# Allegro board XME0726CB_R10_Board_source_file.BRD
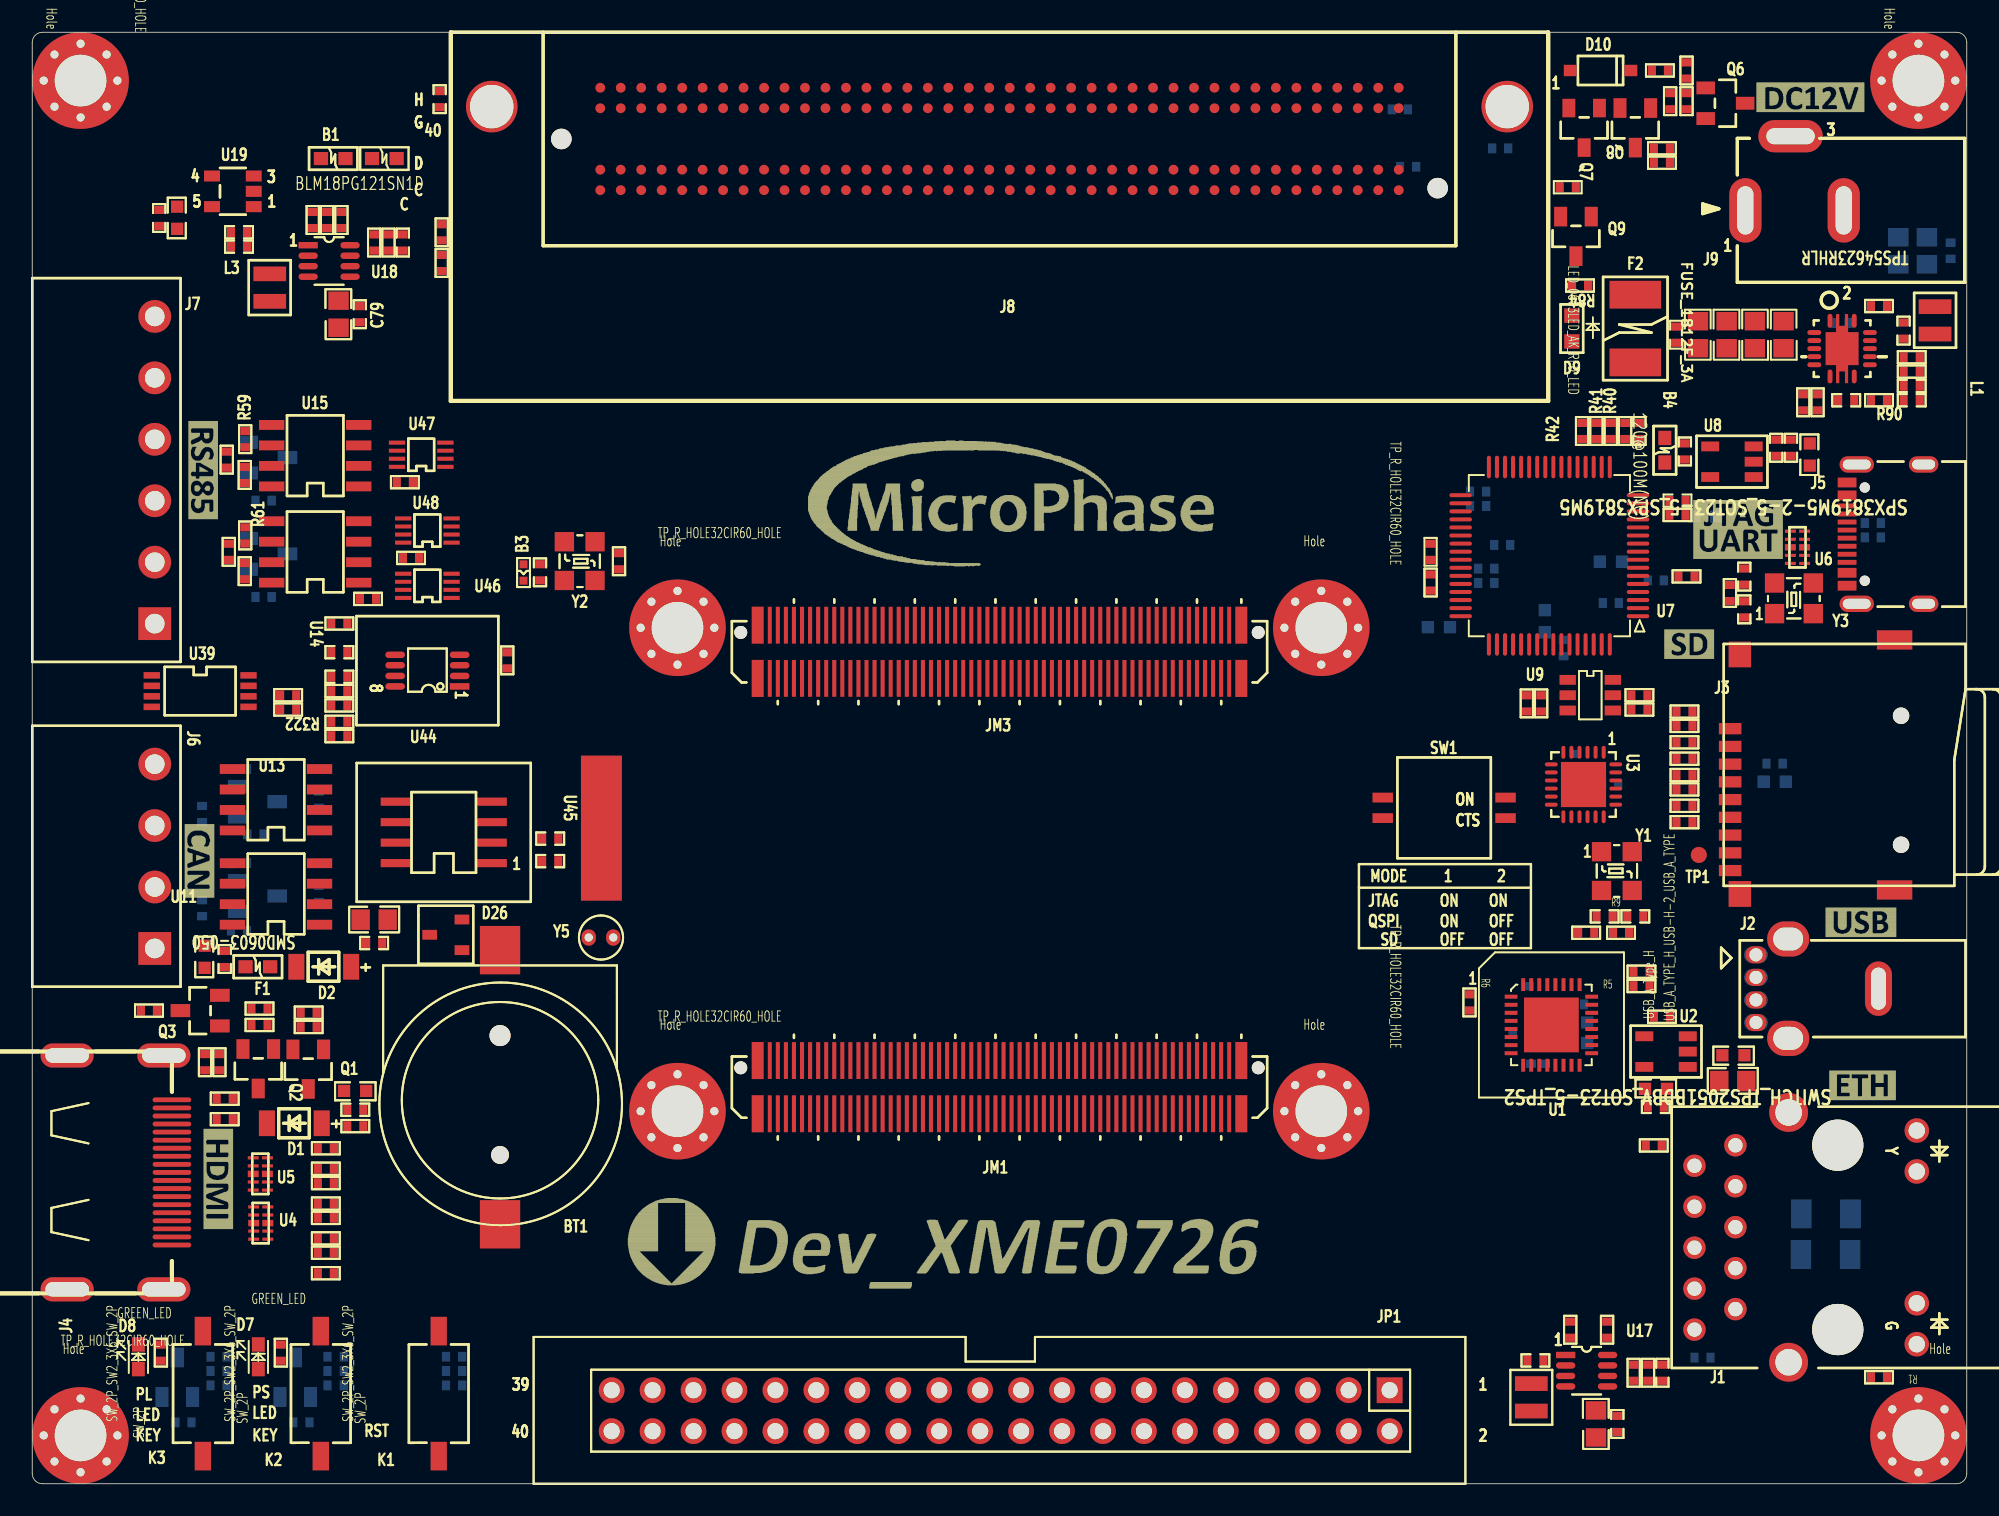
[diagram p0: board, top side]
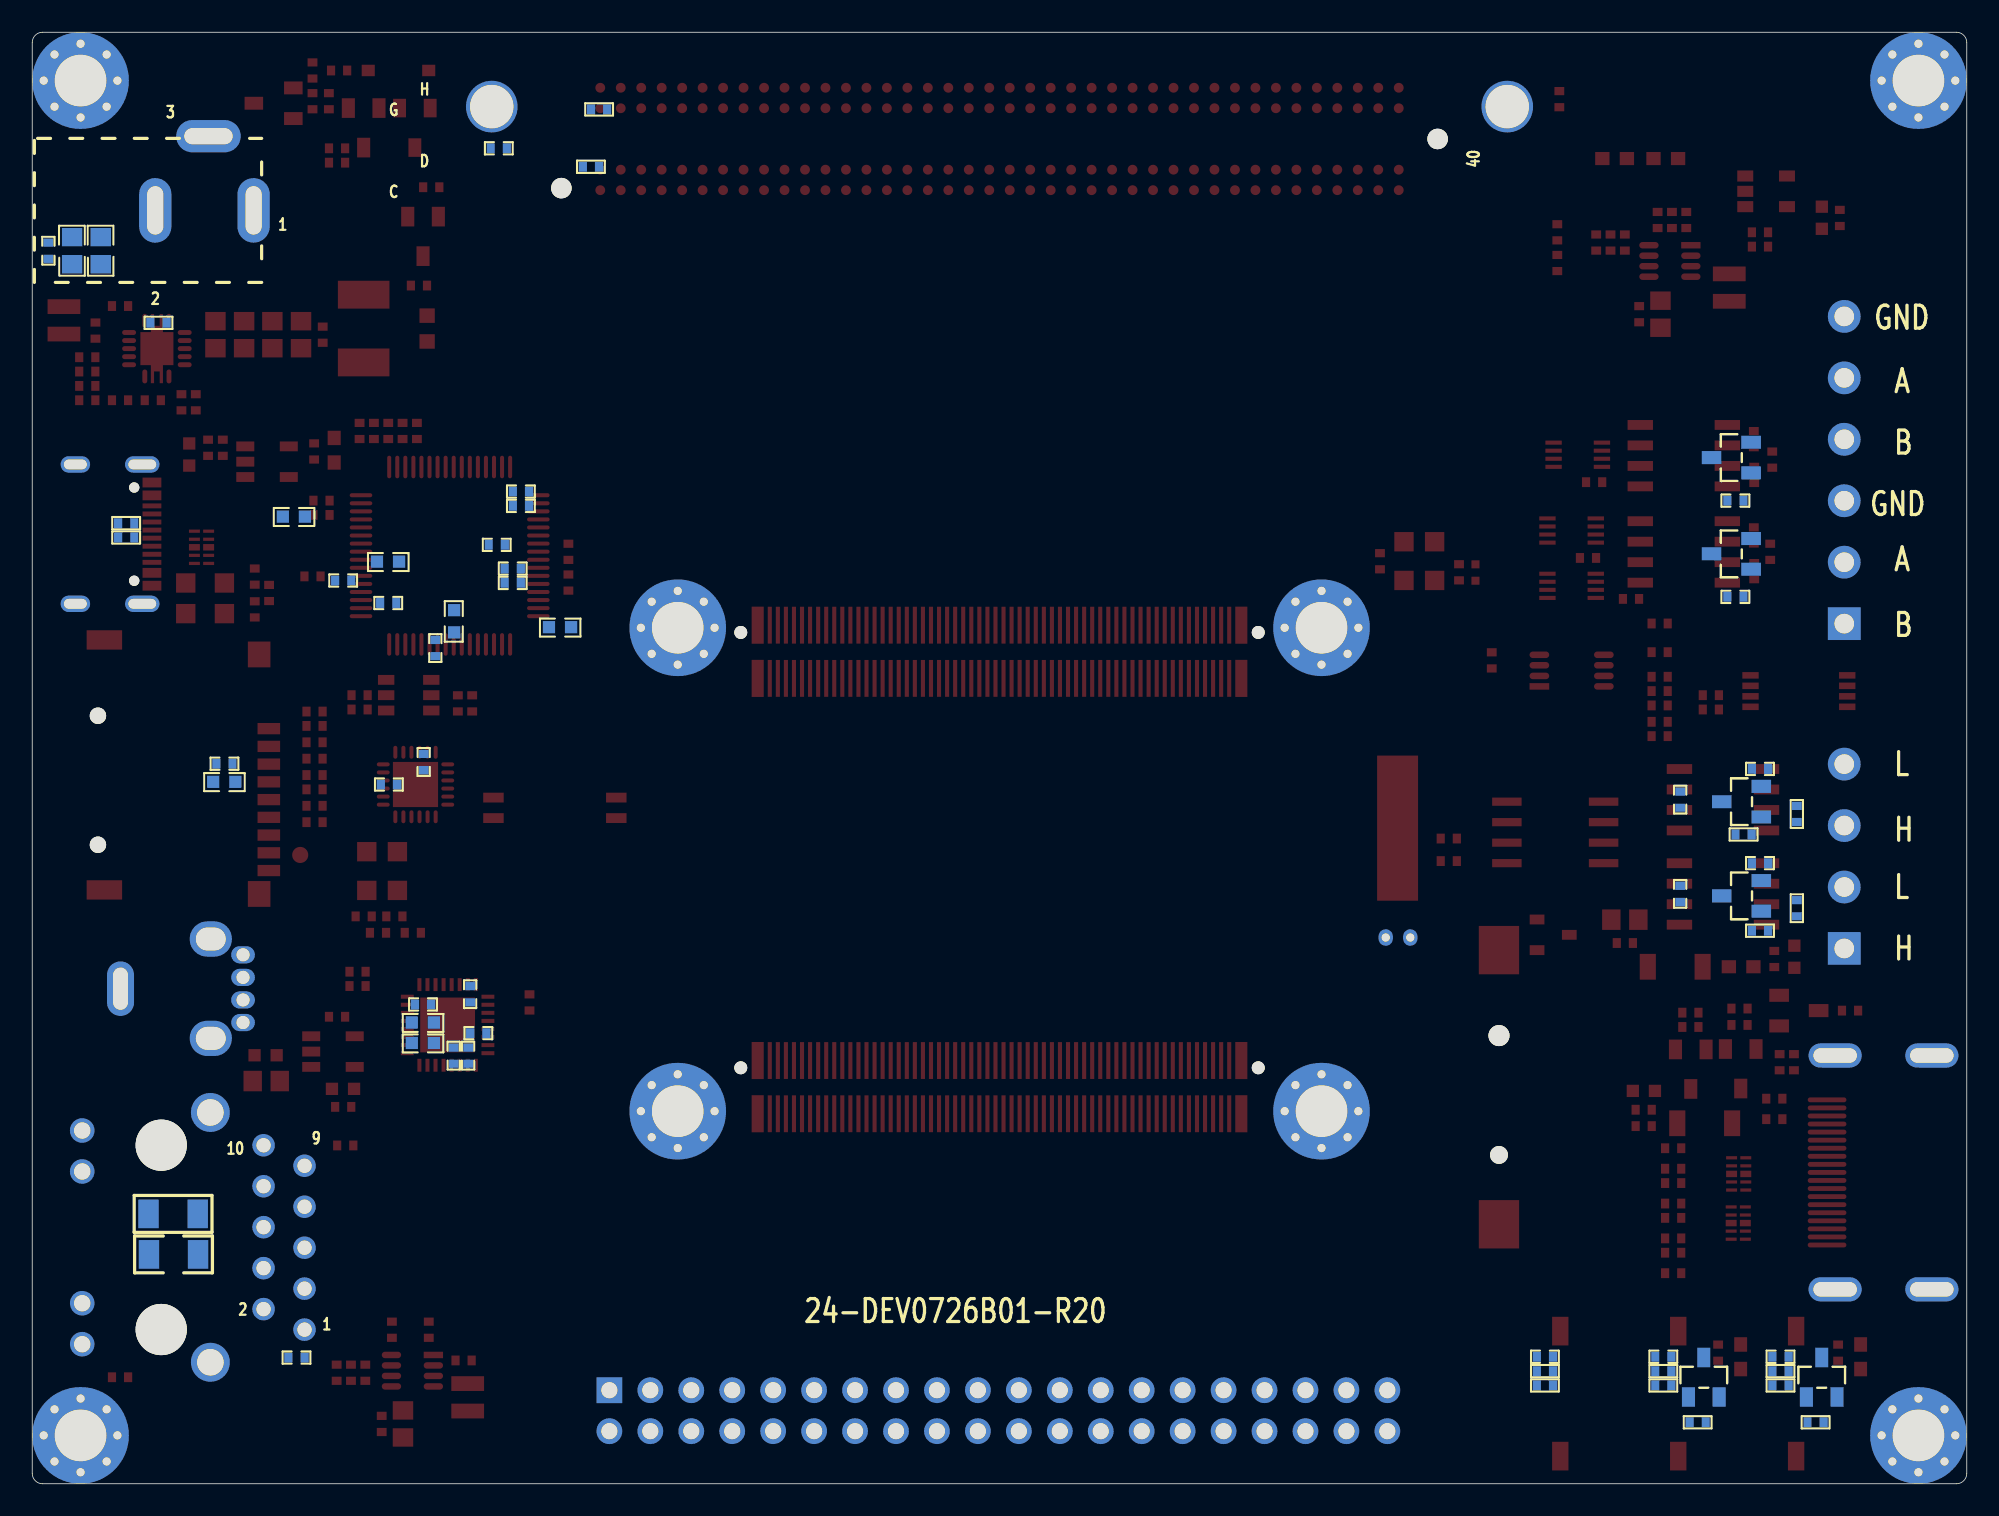
[diagram p1: board, bottom side, seen from below]

Outline 120 x 90 mm; copper layers: TOP, L2-GND, L3-PWR, BOTTOM. Coordinates in mm from the lower left corner of the outline.
Outline path: 0,89.36 arc(0.19,89.81) 0.64,90 119.36,90 arc(119.81,89.81) 120,89.36 120,0.64 arc(119.81,0.19) 119.36,0 0.64,0 arc(0.19,0.19) 0,0.64 0,89.36

## Design rules (mm)
net group DIFFPAIR0: nets USBJTAG_DM USBJTAG_DP
net group DPFMC_LPC_DP0_C2M_: nets FMC_LPC_DP0_C2M_N FMC_LPC_DP0_C2M_P
net group DPFMC_LPC_DP0_M2C_: nets FMC_LPC_DP0_M2C_N FMC_LPC_DP0_M2C_P
net group DPFMC_LPC_GBTCLK0_M2C_: nets FMC_LPC_GBTCLK0_M2C_N FMC_LPC_GBTCLK0_M2C_P
net group DPFMC_LPC_LA31_: nets FMC_LPC_LA31_N FMC_LPC_LA31_P
net group DPFMC_LPC_LA32_: nets FMC_LPC_LA32_N FMC_LPC_LA32_P
net group DPFMC_LPC_LA33_: nets FMC_LPC_LA33_N FMC_LPC_LA33_P
net group DPUSB_HOST_: nets USB_HOST_N USB_HOST_P
net group HDMI1_I2C_SCL_LS: nets HDMI1_I2C_SCL_LS VCC_HDMI1_5V
net group USB_CLK: nets N18264300 USB_CLK
net group 10: nets N18241708 N18241774 N18241890 PG_1V8 PG_3V3 PG_SYS VCC_1V8 VCC_3V3 VCC_5V VCC_BAT VCC_RTC VCCIO13
net group ETH_CLK: nets ETH_MDI0_N ETH_MDI0_P ETH_MDI1_N ETH_MDI1_P ETH_MDI2_N ETH_MDI2_P ETH_MDI3_N ETH_MDI3_P

## Placement (name value [footprint] x y rotation side)
B1  BLM18PG121SN1D  [0603L]  18.67 82.17 0 top
B2  BLM18PG121SN1D(NC)  [0603L]  21.84 82.17 180 top
B3  BLM15AX601SN1D  [0402L]  30.48 56.5 90 top
B4  120@100M(NC)  [0603L]  101.27 64.08 270 top
BT1  CR1220  [BATSO]  29.02 34.09 90 top
C1  0.1uf  [0402C]  103.61 7.82 0 bottom
C2  100pF/1000V  [1206C]  111.24 14.22 0 bottom
C3  0.1uF  [0402C]  92.96 26.54 90 bottom
C4  0.1uF  [0402C]  92.33 27.94 0 bottom
C5  0.1uF  [0402C]  92.84 30.35 270 bottom
C6  0.1uF  [0402C]  93.85 26.54 90 bottom
C7  10uF/6.3V  [0603C]  95.77 27.33 180 bottom
C8  10uF/6.3V  [0603C]  95.77 28.6 180 bottom
C9  0.1uF  [0402C]  95.76 29.72 180 bottom
C10  10uF/10V  [0603C]  105.52 26.57 0 top
C11  47uF/10V  [0805C]  105.49 24.97 0 top
C12  10uF/10V  [0603C]  100.72 24.49 180 top
C13  0.1uF  [0402C]  100.71 23.37 180 top
C14  12pF  [0402C]  97.54 35.18 180 top
C15  12pF  [0402C]  99.44 35.18 0 top
C16  0.1uF  [0402C]  97.88 43.36 180 bottom
C17  10uF/10V  [0603C]  108.09 43.53 180 bottom
C18  0.1uf  [0402C]  108.08 44.65 180 bottom
C19  0.1uF  [0402C]  95.72 44.75 270 bottom
C20  0.1uF  [0402C]  31.5 56.52 90 top
C21  10uF/6.3V  [0603C]  20.03 24.36 0 top
C22  0.1uf  [0402C]  20.04 23.19 0 top
C23  10uF/6.3V  [0603C]  10.69 32.68 270 top
C24  0.1uf  [0402C]  11.94 32.54 270 top
C25  10uF/10V  [0603C]  110.26 63.82 270 top
C26  0.1uf  [0402C]  109.09 64.24 270 top
C27  10uF/10V  [0603C]  87.26 53.11 180 bottom
C28  10uF/10V  [0603C]  93.83 53.48 270 bottom
C29  0.1uf  [0402C]  102.06 60.96 0 top
C30  0.1uF  [0402C]  108.18 64.24 270 top
C31  0.1uF  [0402C]  102.51 64.01 270 top
C32  12pF  [0402C]  106.2 54.22 90 top
C33  12pF  [0402C]  106.2 56.25 270 top
C34  10uF/10V  [0603C]  97.93 57.18 180 bottom
C35  0.1uF  [0402C]  97.92 54.61 180 bottom
C36  0.1uF  [0402C]  91.19 58.22 0 bottom
C37  10uF/10V  [0603C]  103.77 59.97 180 bottom
C38  0.1uF  [0402C]  90.2 55.85 180 bottom
C39  0.1uF  [0402C]  95 51.82 270 bottom
C40  0.1uF  [0402C]  89.69 60.63 0 bottom
C41  0.1uF  [0402C]  89.69 61.52 0 bottom
C42  0.1uF  [0402C]  100.71 56.01 0 bottom
C43  0.1uF  [0402C]  90.2 56.74 180 bottom
C46  0.1uF  [0402C]  17.78 36.58 270 bottom
C47  0.1uF  [0402C]  12.83 38.48 0 bottom
C50  0.1uF  [0402C]  17.78 42.42 270 bottom
C51  0.1uF  [0402C]  12.83 44.32 180 bottom
C52  0.1uF  [0402C]  14.35 54.99 180 bottom
C53  0.1uF  [0402C]  14.35 60.96 180 bottom
C54  0.1uF  [0402C]  26.17 7.87 0 bottom
C55  0.1uF  [0402C]  18.82 7.87 0 bottom
C56  0.1uF  [0402C]  11.55 7.87 0 bottom
C57  0.1uF/25V  [0402C]  116.08 71.5 270 top
C58  10uF/25V  [0805C]  105.11 71.25 90 top
C59  10uF/25V  [0805C]  103.33 71.25 90 top
C60  0.1uF/25V  [0402C]  101.98 71.25 90 top
C61  47uF/6.3V  [0805C]  115.75 76.45 90 bottom
C62  47uF/6.3V  [0805C]  117.53 76.45 90 bottom
C63  0.1uF  [0402C]  119 76.45 90 bottom
C64  10uF/25V  [0805C]  108.64 71.25 270 top
C65  10uF/25V  [0805C]  106.86 71.25 270 top
C66  22nF/50V  [0402C]  116.59 68.07 0 top
C67  47pF/50V  [0402C]  112.52 67.18 180 top
C68  10nF/50V  [0402C]  116.59 67.18 0 top
C69  15pF  [0402C]  101.12 6.88 90 top
C70  0.1uf  [0402C]  93.24 7.65 0 top
C71  47uF/6.3V  [0805C]  97 3.71 90 top
C72  0.1uf  [0402C]  98.32 3.71 90 top
C73  15pF  [0402C]  22.99 76.96 270 top
C74  0.1uf  [0402C]  12.83 76.71 0 top
C75  10uF/6.3V  [0603C]  8.99 78.5 270 top
C76  0.1uF  [0402C]  7.87 78.49 270 top
C77  0.1uf  [0402C]  12.83 77.6 0 top
C78  47uF/6.3V  [0805C]  19 72.52 90 top
C79  0.1uf  [0402C]  20.32 72.52 90 top
C142  0.1uf  [0402C]  99.69 65.28 90 top
C340  0.1uF  [0402C]  19.05 51.56 180 top
C341  0.1uF  [0402C]  19.05 50.04 180 top
C342  47uF/6.3V  [0805C]  21.21 34.98 0 top
C343  0.1uF  [0402C]  21.21 33.53 0 top
C344  15pF(NC)  [0402C]  32.13 38.61 180 top
C345  15pF(NC)  [0402C]  32.13 40.01 180 top
C430  100pF  [0402C]  91.06 82.8 180 bottom
C431  100pF  [0402C]  25.27 85.85 90 top
D1  B5817W-SJ  [SOD-123]  16.26 22.35 180 top
D2  B5817W-SJ  [SOD-123]  18.08 32.05 180 top
D3  SM24CANA-02HTG  [SOT23-3]  13.97 36.45 90 bottom
D4  SM24CANA-02HTG  [SOT23-3]  13.97 42.29 90 bottom
D5  SM712-02HTG(NC)  [SOT23-3]  14.61 57.66 90 bottom
D6  SM712-02HTG(NC)  [SOT23-3]  14.61 63.63 90 bottom
D7  GREEN_LED  [0603LED]  14.03 7.87 90 top
D8  GREEN_LED  [0603LED]  6.58 7.87 90 top
D9  RED_LED  [0603LED_AK]  95.5 71.63 270 top
D10  BZT52C13-7-F  [SOD123_AK]  97.28 87.63 180 top
D26  BAT54C/SOT  [SOT23-236AB]  25.65 34.04 90 top
F1  SMD0603-050  [0603F]  14 32.05 180 top
F2  3A  [1812F]  99.44 71.63 270 top
J1  HR911130A  [RJ45_HR911130A]  112 15.28 270 top
J2  USB_A_Type_H  [USB-H-2]  106.92 30.7 90 top
J3  MicroSD  [TF-15-15B]  112.42 44.57 90 top
J4  HDMI  [HDMI19S]  8.67 19.3 270 top
J5  USB_TYPEC_16P  [TYPEC_16P]  117.32 58.88 90 top
J6  CP381V-4P  [CON4-3P81-H]  7.6 38.91 180 top
J7  CP381V-6P  [CON6-3P81-H]  7.6 62.86 180 top
J8  ASP-134603-01-LCC  [ASP_134603_01]  60 83.38 0 top
J9  DC_JACK  [DC_0050]  112.37 78.96 0 top
JM1  AXK6A2337YG  [CON120-0P5-2X60-M-AXK6A2337]  60 24.59 270 top
JM3  AXK5A2137YG  [CON120-0P5-2X60-M-AXK6A2337]  60 51.59 270 top
JP1  CON40A  [IDC40-2_54A]  60.07 4.53 180 top
K1  SW_2P  [SW2_3X6]  25.21 5.59 90 top
K2  SW_2P  [SW2_3X6]  17.9 5.59 90 top
K3  SW_2P  [SW2_3X6]  10.58 5.59 90 top
L1  2.2uH  [L2520]  118.03 72.14 90 top
L2  1.5uH  [L2520]  92.99 5.36 270 top
L3  1.5uH  [L2520]  14.73 74.17 270 top
M1  Hole  [HOLE32CIR60]  40.03 53.08 0 top
M2  Hole  [HOLE32CIR60]  40.03 23.1 0 top
M3  Hole  [HOLE32CIR60]  79.96 53.08 0 top
M4  Hole  [HOLE32CIR60]  79.96 23.1 0 top
M5  Hole  [HOLE32CIR60]  3 87 0 top
M6  Hole  [HOLE32CIR60]  3 3 0 top
M7  Hole  [HOLE32CIR60]  117 3 0 top
M8  Hole  [HOLE32CIR60]  117 87 0 top
Q1  2N7002  [SOT23-3]  17.12 25.7 180 top
Q2  2N7002  [SOT23-3]  14.02 25.73 180 top
Q3  2N7002  [SOT23-3]  10.41 29.34 90 top
Q4  2N7002  [SOT23-3]  16.31 6.6 180 bottom
Q5  2N7002  [SOT23-3]  9 6.6 180 bottom
Q6  -  [AO3415]  105.03 85.6 270 top
Q7  -  [AO3415]  96.27 84.07 180 top
Q8  MMBTA92LT1G  [SOT23-3]  99.44 84.07 180 top
Q9  MMBT5551  [SOT23-3]  95.76 77.34 180 top
R1  330R  [0402R]  114.55 6.6 180 top
R2  330R  [0402R]  100.58 20.98 180 top
R3  1M  [1206R]  111.26 16.73 180 bottom
R4  4.7K  [0402R]  96.39 34.16 0 top
R5  1K  [0402R]  99.82 30.86 0 top
R6  33R  [0402R]  89.15 29.84 270 top
R7  8.06K 1%  [0402R]  99.82 31.75 0 top
R8  10K 1%  [0402R]  101.09 28.96 0 top
R9  10M  [0402R]  98.55 34.16 0 top
R10  4.7K(NC)  [0402R]  102.49 47.88 0 top
R11  4.7K(NC)  [0402R]  102.49 45.97 0 top
R12  4.7K  [0402R]  102.49 46.99 180 top
R13  4.7K(NC)  [0402R]  102.49 44.96 0 top
R14  4.7K  [0402R]  102.49 43.94 0 top
R15  4.7K(NC)  [0402R]  102.49 43.05 0 top
R16  4.7K(NC)  [0402R]  102.49 42.04 0 top
R17  4.7K(NC)  [0402R]  102.49 41.02 0 top
R18  33R  [0402R]  36.4 57.2 270 top
R19  49.9R  [0402R]  18.21 13.06 0 top
R20  49.9R  [0402R]  18.21 14.33 0 top
R21  49.9R  [0402R]  18.21 15.21 0 top
R22  49.9R  [0402R]  18.21 16.48 0 top
R23  49.9R  [0402R]  18.21 17.37 0 top
R24  49.9R  [0402R]  18.21 18.64 0 top
R25  49.9R  [0402R]  18.21 19.53 0 top
R26  49.9R  [0402R]  18.21 20.8 0 top
R27  27K  [0402R]  20.04 22.17 180 top
R28  4.7K  [0402R]  17.14 28.32 180 top
R29  4.7K  [0402R]  14.1 28.45 0 top
R30  10K  [0402R]  11.61 26.14 270 top
R31  4.7K  [0402R]  11.94 22.61 0 top
R32  4.7K  [0402R]  11.94 23.88 0 top
R33  4.7K  [0402R]  7.24 29.34 180 top
R34  0R  [0402R]  17.14 29.21 0 top
R35  10K  [0402R]  10.72 26.14 90 top
R36  0R  [0402R]  14.1 29.46 180 top
R37  5.1K  [0402R]  114.17 59.56 180 bottom
R38  5.1K  [0402R]  114.17 58.67 180 bottom
R39  100R 1%  [0402R]  98.81 65.28 90 top
R40  100R 1%  [0402R]  97.92 65.28 90 top
R41  100R 1%  [0402R]  97.03 65.28 90 top
R42  100R 1%  [0402R]  96.14 65.28 90 top
R43  4.7K  [0402R]  102.06 60.07 0 top
R44  12K  [0402R]  102.62 56.26 180 top
R45  10K(NC)  [0402R]  99.69 48.9 180 top
R46  10K(NC)  [0402R]  99.69 48.01 180 top
R47  0R  [0402R]  86.74 57.78 90 top
R48  10K 1%  [0402R]  92.71 48.39 90 top
R49  0R  [0402R]  86.74 55.88 90 top
R50  2K  [0402R]  93.6 48.39 270 top
R51  10M(NC)  [0402R]  105.31 55.23 90 top
R52  120R  [0402R]  10.54 35.69 270 bottom
R53  10K 1%  [0402R]  12.83 34.29 180 bottom
R54  120R  [0402R]  10.54 41.53 270 bottom
R55  10K 1%  [0402R]  13.84 40.26 0 bottom
R56  4.7K  [0402R]  13.21 58.8 270 top
R57  120R  [0402R]  12.19 57.78 270 top
R58  4.7K  [0402R]  13.18 56.58 270 top
R59  4.7K  [0402R]  13.21 64.77 270 top
R60  120R  [0402R]  12.06 63.5 90 top
R61  4.7K  [0402R]  13.18 62.55 270 top
R62  10K  [0402R]  84.84 85.22 0 bottom
R63  10K  [0402R]  85.34 81.66 0 bottom
R64  10K  [0402R]  25.4 77.6 270 top
R65  10K  [0402R]  25.4 75.69 270 top
R66  10K 1%  [0402R]  26.17 6.99 180 bottom
R67  10K 1%  [0402R]  18.82 6.99 180 bottom
R68  10K 1%  [0402R]  11.55 6.99 180 bottom
R69  100R 1%  [0402R]  26.17 6.1 180 bottom
R70  100R 1%  [0402R]  18.82 6.1 180 bottom
R71  100R 1%  [0402R]  11.55 6.1 180 bottom
R72  1K  [0402R]  7.98 8.13 90 top
R73  1K  [0402R]  15.42 8.13 90 top
R74  10K 1%  [0402R]  16.69 3.81 0 bottom
R75  10K 1%  [0402R]  9.38 3.81 0 bottom
R76  30K  [0402R]  102.62 85.72 90 top
R77  330R  [0402R]  101.6 85.72 90 top
R78  10K 1%  [0402R]  116.59 68.96 0 top
R79  4.7K  [0402R]  101.09 82.8 180 top
R81  10K 1%  [0402R]  100.97 87.63 180 top
R82  10K 1%  [0402R]  114.55 73.03 0 top
R83  82K 1%  [0402R]  109.86 67.06 270 top
R84  2K  [0402R]  96.01 74.3 0 top
R85  30K  [0402R]  102.62 87.63 90 top
R86  3.32K 1%  [0402R]  116.59 69.85 0 top
R87  10K 1%  [0402R]  101.09 81.92 0 top
R88  10K 1%  [0402R]  95.25 80.39 0 top
R89  100K 1%  [0402R]  112.17 71.98 0 bottom
R90  3.74K 1%  [0402R]  114.55 67.18 0 top
R91  11K 1%  [0402R]  110.74 67.06 90 top
R92  4.7K  [0402R]  95.4 9.55 90 top
R93  4.7K  [0402R]  97.69 9.55 270 top
R94  20K 1%  [0402R]  100.23 6.88 270 top
R95  10K 1%  [0402R]  99.34 6.88 90 top
R96  4.7K  [0402R]  17.4 78.36 90 top
R97  45.3K 1%  [0402R]  22.1 76.96 90 top
R98  10K 1%  [0402R]  21.21 76.96 270 top
R99  0R(NC)  [0402R]  18.29 78.36 270 top
R100  0R  [0402R]  19.18 78.36 270 top
R162  4.7K  [0402R]  19.05 53.34 0 top
R163  4.7K  [0402R]  29.46 51.05 270 top
R164  4.7K  [0402R]  19.05 48.26 0 top
R165  4.7K  [0402R]  19.05 46.35 0 top
R319  4.7K  [0402R]  19.05 49.15 0 top
R320  4.7K  [0402R]  19.05 47.24 0 top
R321  0R  [0402R]  15.88 48.9 180 top
R322  0R  [0402R]  15.88 48.01 180 top
R323  200K  [0402R]  20.83 54.86 0 top
R324  200K  [0402R]  23.5 57.4 180 top
R325  200K  [0402R]  23.11 62.1 180 top
SW1  SW DIP-2  [218-2LPSTR]  87.58 41.91 270 top
TP1  TP_R  [TP4]  103.38 38.99 90 top
U1  USB3320C-EZK  [QFN32-0P5-5X5T]  94.23 28.45 0 top
U2  TPS2051BDBV  [SOT23-5]  101.35 26.8 180 top
U3  TXS02612RTWR  [QFN24-0P5-4X4]  96.23 43.36 270 top
U4  TPD4E05U06(NC)  [ESD_0524P]  14.17 16.16 90 top
U5  TPD4E05U06(NC)  [ESD_0524P]  14.15 19.21 90 top
U6  TPD4E05U06  [ESD_0524P]  109.5 58.06 270 top
U7  FT2232H  [LQFP-64_0R5_10X10]  94.11 57.54 180 top
U8  SPX3819M5-L-3-3  [SOT23-5]  105.44 63.37 180 top
U9  93LC56BT-I/OT  [SOT23-6]  96.65 48.9 0 top
U11  SN65HVD230  [SOP8-1P27-4X5]  15.12 36.57 180 top
U13  SN65HVD230  [SOP8-1P27-4X5]  15.12 42.41 180 top
U14  MAX3485  [SOP8-1P27-4X5]  17.55 57.78 180 top
U15  MAX3485  [SOP8-1P27-4X5]  17.55 63.75 180 top
U16  TPS54623RHLR  [QFN14-0P5-3P5X3P5]  112.27 70.38 270 top
U17  MP2143DJ  [SOT23-8]  96.42 7.01 270 top
U18  MP2143DJ  [SOT23-8]  18.41 75.82 270 top
U19  SPX3819M5-L-1-8(NC)  [SOT-23]  12.45 80.14 90 top
U39  BL24C256A  [SOP8-0P65-3X4P4]  10.41 49.15 0 top
U44  TXS0102DCTR  [SOP8-0P65-2X4]  24.51 50.42 90 top
U45  RX8010SJ  [SOIC8-1P27-5X4]  25.53 40.39 90 top
U46  PCA9306DCUR  [SOP8-0P5-2X2P3]  24.51 55.68 180 top
U47  PCA9306DCUR  [SOP8-0P5-2X2P3]  24.13 63.8 180 top
U48  PCA9306DCUR  [SOP8-0P5-2X2P3]  24.51 59.11 180 top
Y1  24M  [XTAL3225M]  98.3 37.99 270 top
Y2  50M_OSC  [XTAL3225M]  33.96 57.21 90 top
Y3  12M_CY  [XTAL3225M]  109.28 54.9 0 top
Y5  32.768K(NC)  [CY_SMALL]  36.04 33.87 180 top

## Library data of the parts
B1-B3 = BEAD
B4 = 1212_BEAD_0
BT1 = BATTERY_0
C1 C17 C18 C21-C26 C29 C64 C65 C69-C74 C77-C79 C142 = C
C2-C16 C19 C20 C27 C28 C30-C43 C46 C47 C50-C63 C66-C68 C75 C76 C340-C345 C430 C431 = CAP
D1 D2 = DIODE
D3-D6 = SM24CANA-02HTG
D7-D9 = LED
D10 = TVS_SMAJ5_0.0CA_5V: User Part Number: *; Tolerance: *
D26 = BAT54C/SOT
F1 F2 = FUSE
J1 = RJ45_HR911130A: Tolerance: *; User Part Number: *
J2 = USB_A_Type_H
J3 = MicroSD_1
J4 = HDMI
J5 = USB_TYPEC_16P: Tolerance: *; User Part Number: *
J6 = CP381V-4P: User Part Number: *; Tolerance: *
J7 = CP381V-6P: User Part Number: *; Tolerance: *
J8 = ASP-134603-01-LCC_0
J9 = POWER_DC-JACK: User Part Number: *********; Tolerance: ?
JM1 JM3 = CONN SOCKET 60x2: User Part Number: *; Tolerance: *
JP1 = CON40A
K1-K3 = SW_2P
L1 = INDUCTOR: User Part Number: *; Tolerance: *
L2 L3 = L: User Part Number: *; Tolerance: *
M1-M8 TP1 = TP_R
Q1-Q5 = N_2N7002
Q6 Q7 = AO3415
Q8 = MMBT5401L_0
Q9 = NPN2
R1-R3 R8 R9 R11 R13-R17 R27-R30 R32-R51 R66-R71 R76 R77 R79 R81 R84 R85 R87 R88 R92-R100 R162-R165 R319-R322 = R
R4 R5 R7 R19-R26 R72-R75 = RES
R6 = RES: signal model: RES_0402R_33R_33R
R10 R12 R18 R52-R65 R78 R82 R83 R86 R89-R91 R323-R325 = RESISTOR
R31 = R: signal model: RES_0402R_33R_33R
SW1 = SW DIP-2_0
U1 = USB3320C-EZK: User Part Number: pn; Tolerance: RichardLC
U2 = Switch_TPS2051BDBV
U3 = LevelShift_TXS02612_SDIO
U4-U6 = RCLAMP0564P
U7 = FT2232H
U8 U19 = SPX3819M5-2-5
U9 = E2PROM-AT93LC56B: Tolerance: *; User Part Number: *
U11 U13 = SN65HVD230
U14 U15 = MAX3485
U16 = TPS54821
U17 U18 = MP2143
U39 = E2PROM-AT24CM01-1Mb: Tolerance: *; User Part Number: *
U44 = LevelShift_TXS0102
U45 = PCF8563
U46-U48 = PCA9306DCUR: Tolerance: *; User Part Number: *
Y1 Y3 = CRYSTAL_4pin
Y2 = OSC
Y5 = CRYSTAL

## Footprints (pads in the part's own frame, mm; a bottom-side part is the same pattern mirrored in y, then rotated)
218-2LPSTR
  rect 0.61x1.27 smd: 1(-0.635,-3.81) 2(0.635,-3.81) 3(0.635,3.81) 4(-0.635,3.81)
0402C
  rect 0.508x0.61 smd: 1(-0.5,0) 2(0.5,0)
0402L
  rect 0.5x0.5 smd: 1(-0.508,0) 2(0.508,0)
0402R
  rect 0.508x0.61 smd: 1(-0.5,0) 2(0.5,0)
0603C
  rect 0.762x0.762 smd: 1(-0.686,0) 2(0.686,0)
0603F
  rect 0.889x0.813 smd: 1(-0.762,0) 2(0.762,0)
0603L
  rect 0.889x0.813 smd: 1(-0.762,0) 2(0.762,0)
0603LED
  rect 0.9x0.8 smd: A(-0.762,0) K(0.762,0)
0603LED_AK
  rect 0.9x0.95 smd: A(0.8,0) K(-0.8,0)
0805C
  rect 1.143x1.27 smd: 1(-0.838,0) 2(0.838,0)
1206C
  rect 1.27x1.778 smd: 1(-1.524,0) 2(1.524,0)
1206R
  rect 1.27x1.778 smd: 1(-1.524,0) 2(1.524,0)
1812F
  rect 1.727x3.2 smd: 1(-2.1,0) 2(2.1,0)
AO3415
  rect 0.8x1.15 smd: D(0,1.225) G(-0.95,-1.225) S(0.95,-1.225)
ASP_134603_01
  round 1.27 hole 1.27 unplated: (-27.178,0) (27.178,-3.048)
  round 0.61 smd: C1(24.765,-3.175) C2(23.495,-3.175) C3(22.225,-3.175) C4(20.955,-3.175) C5(19.685,-3.175) C6(18.415,-3.175) C7(17.145,-3.175) C8(15.875,-3.175) C9(14.605,-3.175) C10(13.335,-3.175) C11(12.065,-3.175) C12(10.795,-3.175) C13(9.525,-3.175) C14(8.255,-3.175) C15(6.985,-3.175) C16(5.715,-3.175) C17(4.445,-3.175) C18(3.175,-3.175) C19(1.905,-3.175) C20(0.635,-3.175) C21(-0.635,-3.175) C22(-1.905,-3.175) C23(-3.175,-3.175) C24(-4.445,-3.175) C25(-5.715,-3.175) C26(-6.985,-3.175) C27(-8.255,-3.175) C28(-9.525,-3.175) C29(-10.795,-3.175) C30(-12.065,-3.175) C31(-13.335,-3.175) C32(-14.605,-3.175) C33(-15.875,-3.175) C34(-17.145,-3.175) C35(-18.415,-3.175) C36(-19.685,-3.175) C37(-20.955,-3.175) C38(-22.225,-3.175) C39(-23.495,-3.175) C40(-24.765,-3.175) D1(24.765,-1.905) D2(23.495,-1.905) D3(22.225,-1.905) D4(20.955,-1.905) D5(19.685,-1.905) D6(18.415,-1.905) D7(17.145,-1.905) D8(15.875,-1.905) D9(14.605,-1.905) D10(13.335,-1.905) D11(12.065,-1.905) D12(10.795,-1.905) D13(9.525,-1.905) D14(8.255,-1.905) D15(6.985,-1.905) D16(5.715,-1.905) D17(4.445,-1.905) D18(3.175,-1.905) D19(1.905,-1.905) D20(0.635,-1.905) D21(-0.635,-1.905) D22(-1.905,-1.905) D23(-3.175,-1.905) D24(-4.445,-1.905) D25(-5.715,-1.905) D26(-6.985,-1.905) D27(-8.255,-1.905) D28(-9.525,-1.905) D29(-10.795,-1.905) D30(-12.065,-1.905) D31(-13.335,-1.905) D32(-14.605,-1.905) D33(-15.875,-1.905) D34(-17.145,-1.905) D35(-18.415,-1.905) D36(-19.685,-1.905) D37(-20.955,-1.905) D38(-22.225,-1.905) D39(-23.495,-1.905) D40(-24.765,-1.905) G1(24.765,1.905) G2(23.495,1.905) G3(22.225,1.905) G4(20.955,1.905) G5(19.685,1.905) G6(18.415,1.905) G7(17.145,1.905) G8(15.875,1.905) G9(14.605,1.905) G10(13.335,1.905) G11(12.065,1.905) G12(10.795,1.905) G13(9.525,1.905) G14(8.255,1.905) G15(6.985,1.905) G16(5.715,1.905) G17(4.445,1.905) G18(3.175,1.905) G19(1.905,1.905) G20(0.635,1.905) G21(-0.635,1.905) G22(-1.905,1.905) G23(-3.175,1.905) G24(-4.445,1.905) G25(-5.715,1.905) G26(-6.985,1.905) G27(-8.255,1.905) G28(-9.525,1.905) G29(-10.795,1.905) G30(-12.065,1.905) G31(-13.335,1.905) G32(-14.605,1.905) G33(-15.875,1.905) G34(-17.145,1.905) G35(-18.415,1.905) G36(-19.685,1.905) G37(-20.955,1.905) G38(-22.225,1.905) G39(-23.495,1.905) G40(-24.765,1.905) H1(24.765,3.175) H2(23.495,3.175) H3(22.225,3.175) H4(20.955,3.175) H5(19.685,3.175) H6(18.415,3.175) H7(17.145,3.175) H8(15.875,3.175) H9(14.605,3.175) H10(13.335,3.175) H11(12.065,3.175) H12(10.795,3.175) H13(9.525,3.175) H14(8.255,3.175) H15(6.985,3.175) H16(5.715,3.175) H17(4.445,3.175) H18(3.175,3.175) H19(1.905,3.175) H20(0.635,3.175) H21(-0.635,3.175) H22(-1.905,3.175) H23(-3.175,3.175) H24(-4.445,3.175) H25(-5.715,3.175) H26(-6.985,3.175) H27(-8.255,3.175) H28(-9.525,3.175) H29(-10.795,3.175) H30(-12.065,3.175) H31(-13.335,3.175) H32(-14.605,3.175) H33(-15.875,3.175) H34(-17.145,3.175) H35(-18.415,3.175) H36(-19.685,3.175) H37(-20.955,3.175) H38(-22.225,3.175) H39(-23.495,3.175) H40(-24.765,3.175)
  round 3.2 hole 2.692: ST1(31.496,2.007) ST2(-31.496,2.007)
BATSO
  rect 3x2.5 smd: 1(-1,0) 2(-18,0)
  round 1.3 hole 1.3: 3(-6.3,0)
  round 1.1 hole 1.1: 4(-13.7,0)
CON4-3P81-H
  rect 2.032x2.032 hole 1.219: 1(0,5.715)
  round 2.032 hole 1.219: 2(0,1.905) 3(0,-1.905) 4(0,-5.715)
CON6-3P81-H
  rect 2.032x2.032 hole 1.219: 1(0,9.525)
  round 2.032 hole 1.219: 2(0,5.715) 3(0,1.905) 4(0,-1.905) 5(0,-5.715) 6(0,-9.525)
CON120-0P5-2X60-M-AXK6A2337
  round 0.8 hole 0.8 unplated: (-1.2,16.05) (-1.2,-16.05)
  rect 2.3x0.75 smd: 1(1.65,-15) 2(-1.65,-15) 119(1.65,15) 120(-1.65,15)
  rect 2.286x0.254 smd: 3(1.65,-14.25) 4(-1.65,-14.25) 5(1.65,-13.75) 6(-1.65,-13.75) 7(1.65,-13.25) 8(-1.65,-13.25) 9(1.65,-12.75) 10(-1.65,-12.75) 11(1.65,-12.25) 12(-1.65,-12.25) 13(1.65,-11.75) 14(-1.65,-11.75) 15(1.65,-11.25) 16(-1.65,-11.25) 17(1.65,-10.75) 18(-1.65,-10.75) 19(1.65,-10.25) 20(-1.65,-10.25) 21(1.65,-9.75) 22(-1.65,-9.75) 23(1.65,-9.25) 24(-1.65,-9.25) 25(1.65,-8.75) 26(-1.65,-8.75) 27(1.65,-8.25) 28(-1.65,-8.25) 29(1.65,-7.75) 30(-1.65,-7.75) 31(1.65,-7.25) 32(-1.65,-7.25) 33(1.65,-6.75) 34(-1.65,-6.75) 35(1.65,-6.25) 36(-1.65,-6.25) 37(1.65,-5.75) 38(-1.65,-5.75) 39(1.65,-5.25) 40(-1.65,-5.25) 41(1.65,-4.75) 42(-1.65,-4.75) 43(1.65,-4.25) 44(-1.65,-4.25) 45(1.65,-3.75) 46(-1.65,-3.75) 47(1.65,-3.25) 48(-1.65,-3.25) 49(1.65,-2.75) 50(-1.65,-2.75) 51(1.65,-2.25) 52(-1.65,-2.25) 53(1.65,-1.75) 54(-1.65,-1.75) 55(1.65,-1.25) 56(-1.65,-1.25) 57(1.65,-0.75) 58(-1.65,-0.75) 59(1.65,-0.25) 60(-1.65,-0.25) 61(1.65,0.25) 62(-1.65,0.25) 63(1.65,0.75) 64(-1.65,0.75) 65(1.65,1.25) 66(-1.65,1.25) 67(1.65,1.75) 68(-1.65,1.75) 69(1.65,2.25) 70(-1.65,2.25) 71(1.65,2.75) 72(-1.65,2.75) 73(1.65,3.25) 74(-1.65,3.25) 75(1.65,3.75) 76(-1.65,3.75) 77(1.65,4.25) 78(-1.65,4.25) 79(1.65,4.75) 80(-1.65,4.75) 81(1.65,5.25) 82(-1.65,5.25) 83(1.65,5.75) 84(-1.65,5.75) 85(1.65,6.25) 86(-1.65,6.25) 87(1.65,6.75) 88(-1.65,6.75) 89(1.65,7.25) 90(-1.65,7.25) 91(1.65,7.75) 92(-1.65,7.75) 93(1.65,8.25) 94(-1.65,8.25) 95(1.65,8.75) 96(-1.65,8.75) 97(1.65,9.25) 98(-1.65,9.25) 99(1.65,9.75) 100(-1.65,9.75) 101(1.65,10.25) 102(-1.65,10.25) 103(1.65,10.75) 104(-1.65,10.75) 105(1.65,11.25) 106(-1.65,11.25) 107(1.65,11.75) 108(-1.65,11.75) 109(1.65,12.25) 110(-1.65,12.25) 111(1.65,12.75) 112(-1.65,12.75) 113(1.65,13.25) 114(-1.65,13.25) 115(1.65,13.75) 116(-1.65,13.75) 117(1.65,14.25) 118(-1.65,14.25)
CY_SMALL
  oval 0.889x1.016 hole 0.508: 1(0,0) 2(1.524,0)
  rect 2.54x9 smd: 3(0.737,-6.782)
DC_0050
  oval 2x4 hole 1x3: 1(-6.1,0) 2(0,0)
  oval 4x2 hole 3x1: 3(-3.3,4.6)
ESD_0524P
  rect 0.2x0.68 smd: 1(-1,-0.44) 2(-0.5,-0.44) 4(0.5,-0.44) 5(1,-0.44) 6(1,0.44) 7(0.5,0.44) 9(-0.5,0.44) 10(-1,0.44)
  rect 0.4x0.68 smd: 3(0,-0.44) 8(0,0.44)
HDMI19S
  oval 0.3x2.4 smd: 1(4.5,0) 2(4,0) 3(3.5,0) 4(3,0) 5(2.5,0) 6(2,0) 7(1.5,0) 8(1,0) 9(0.5,0) 10(0,0) 11(-0.5,0) 12(-1,0) 13(-1.5,0) 14(-2,0) 15(-2.5,0) 16(-3,0) 17(-3.5,0) 18(-4,0) 19(-4.5,0)
  oval 1.5x3.3 hole 0.9x2.7: BO1(7.25,-0.5) BO2(-7.25,-0.5) BO3(7.25,-6.5) BO4(-7.25,-6.5)
HOLE32CIR60
  round 1.016 hole 0.508: (-2.286,0) (-1.617,1.617) (-1.617,-1.617) (0,2.286) (0,-2.286) (1.617,1.617) (1.617,-1.617) (2.286,0)
  round 5.994 hole 3.2: 1(0,0)
IDC40-2_54A
  rect 1.6x1.6 hole 1: 1(-24.13,-1.27)
  round 1.6 hole 1: 2(-24.13,1.27) 3(-21.59,-1.27) 4(-21.59,1.27) 5(-19.05,-1.27) 6(-19.05,1.27) 7(-16.51,-1.27) 8(-16.51,1.27) 9(-13.97,-1.27) 10(-13.97,1.27) 11(-11.43,-1.27) 12(-11.43,1.27) 13(-8.89,-1.27) 14(-8.89,1.27) 15(-6.35,-1.27) 16(-6.35,1.27) 17(-3.81,-1.27) 18(-3.81,1.27) 19(-1.27,-1.27) 20(-1.27,1.27) 21(1.27,-1.27) 22(1.27,1.27) 23(3.81,-1.27) 24(3.81,1.27) 25(6.35,-1.27) 26(6.35,1.27) 27(8.89,-1.27) 28(8.89,1.27) 29(11.43,-1.27) 30(11.43,1.27) 31(13.97,-1.27) 32(13.97,1.27) 33(16.51,-1.27) 34(16.51,1.27) 35(19.05,-1.27) 36(19.05,1.27) 37(21.59,-1.27) 38(21.59,1.27) 39(24.13,-1.27) 40(24.13,1.27)
L2520
  rect 0.914x2.032 smd: 1(-0.85,0) 2(0.85,0)
LQFP-64_0R5_10X10
  oval 1.4x0.25 smd: 1(-5.5,3.75) 2(-5.5,3.25) 3(-5.5,2.75) 4(-5.5,2.25) 5(-5.5,1.75) 6(-5.5,1.25) 7(-5.5,0.75) 8(-5.5,0.25) 9(-5.5,-0.25) 10(-5.5,-0.75) 11(-5.5,-1.25) 12(-5.5,-1.75) 13(-5.5,-2.25) 14(-5.5,-2.75) 15(-5.5,-3.25) 16(-5.5,-3.75) 33(5.5,-3.75) 34(5.5,-3.25) 35(5.5,-2.75) 36(5.5,-2.25) 37(5.5,-1.75) 38(5.5,-1.25) 39(5.5,-0.75) 40(5.5,-0.25) 41(5.5,0.25) 42(5.5,0.75) 43(5.5,1.25) 44(5.5,1.75) 45(5.5,2.25) 46(5.5,2.75) 47(5.5,3.25) 48(5.5,3.75)
  oval 0.25x1.4 smd: 17(-3.75,-5.5) 18(-3.25,-5.5) 19(-2.75,-5.5) 20(-2.25,-5.5) 21(-1.75,-5.5) 22(-1.25,-5.5) 23(-0.75,-5.5) 24(-0.25,-5.5) 25(0.25,-5.5) 26(0.75,-5.5) 27(1.25,-5.5) 28(1.75,-5.5) 29(2.25,-5.5) 30(2.75,-5.5) 31(3.25,-5.5) 32(3.75,-5.5) 49(3.75,5.5) 50(3.25,5.5) 51(2.75,5.5) 52(2.25,5.5) 53(1.75,5.5) 54(1.25,5.5) 55(0.75,5.5) 56(0.25,5.5) 57(-0.25,5.5) 58(-0.75,5.5) 59(-1.25,5.5) 60(-1.75,5.5) 61(-2.25,5.5) 62(-2.75,5.5) 63(-3.25,5.5) 64(-3.75,5.5)
QFN14-0P5-3P5X3P5
  oval 0.864x0.305 smd: 1(-1.725,-0.75) 7(1.725,-0.75) 8(1.725,0.75) 14(-1.725,0.75)
  oval 0.305x0.864 smd: 2(-1,-1.725) 3(-0.5,-1.725) 4(0,-1.725) 5(0.5,-1.725) 6(1,-1.725) 9(1,1.725) 10(0.5,1.725) 11(0,1.725) 12(-0.5,1.725) 13(-1,1.725)
  custom 4.29x2.05 smd: 15(0,0)
QFN24-0P5-4X4
  oval 0.8x0.25 smd: 1(-2,1.25) 2(-2,0.75) 3(-2,0.25) 4(-2,-0.25) 5(-2,-0.75) 6(-2,-1.25) 13(2,-1.25) 14(2,-0.75) 15(2,-0.25) 16(2,0.25) 17(2,0.75) 18(2,1.25)
  oval 0.25x0.8 smd: 7(-1.25,-2) 8(-0.75,-2) 9(-0.25,-2) 10(0.25,-2) 11(0.75,-2) 12(1.25,-2) 19(1.25,2) 20(0.75,2) 21(0.25,2) 22(-0.25,2) 23(-0.75,2) 24(-1.25,2)
  rect 2.8x2.8 smd: 25(0,0)
QFN32-0P5-5X5T
  rect 0.8x0.25 smd: 1(-2.5,1.75) 2(-2.5,1.25) 3(-2.5,0.75) 4(-2.5,0.25) 5(-2.5,-0.25) 6(-2.5,-0.75) 7(-2.5,-1.25) 8(-2.5,-1.75) 17(2.5,-1.75) 18(2.5,-1.25) 19(2.5,-0.75) 20(2.5,-0.25) 21(2.5,0.25) 22(2.5,0.75) 23(2.5,1.25) 24(2.5,1.75)
  rect 0.25x0.8 smd: 9(-1.75,-2.5) 10(-1.25,-2.5) 11(-0.75,-2.5) 12(-0.25,-2.5) 13(0.25,-2.5) 14(0.75,-2.5) 15(1.25,-2.5) 16(1.75,-2.5) 25(1.75,2.5) 26(1.25,2.5) 27(0.75,2.5) 28(0.25,2.5) 29(-0.25,2.5) 30(-0.75,2.5) 31(-1.25,2.5) 32(-1.75,2.5)
  rect 3.4x3.4 smd: 33(0,0)
RJ45_HR911130A
  round 3.175 hole 3.175 unplated: (-5.715,0) (5.715,0)
  round 1.397 hole 0.889: 1(5.72,-8.89) 2(4.45,-6.35) 3(3.18,-8.89) 4(1.91,-6.35) 5(0.64,-8.89) 6(-0.63,-6.35) 7(-1.9,-8.89) 8(-3.17,-6.35) 9(-4.44,-8.89) 10(-5.71,-6.35)
  round 1.524 hole 1.016: 11(6.625,4.9) 12(4.085,4.9) 13(-4.085,4.9) 14(-6.625,4.9)
  round 2.413 hole 1.651: 15(7.745,-3.05) 16(-7.745,-3.05)
SOD123_AK
  rect 0.813x0.711 smd: A(1.875,0) K(-1.875,0)
SOD-123
  rect 1x1.6 smd: A(-1.7,0) K(1.7,0)
SOIC8-1P27-5X4
  rect 0.508x1.829 smd: 1(-1.905,-3) 2(-0.635,-3) 3(0.635,-3) 4(1.905,-3) 5(1.905,3) 6(0.635,3) 7(-0.635,3) 8(-1.905,3)
SOP8-0P5-2X2P3
  rect 1.016x0.254 smd: 1(-1.5,0.75) 2(-1.5,0.25) 3(-1.5,-0.25) 4(-1.5,-0.75) 5(1.5,-0.75) 6(1.5,-0.25) 7(1.5,0.25) 8(1.5,0.75)
SOP8-0P65-2X4
  rect 0.406x1.219 smd: 1(-0.98,-2)
  oval 0.406x1.219 smd: 2(-0.33,-2) 3(0.33,-2) 4(0.98,-2) 5(0.98,2) 6(0.33,2) 7(-0.33,2) 8(-0.98,2)
SOP8-0P65-3X4P4
  rect 1.016x0.406 smd: 1(-3,0.975) 2(-3,0.325) 3(-3,-0.325) 4(-3,-0.975) 5(3,-0.975) 6(3,-0.325) 7(3,0.325) 8(3,0.975)
SOP8-1P27-4X5
  rect 1.575x0.61 smd: 1(-2.7,1.905) 2(-2.7,0.635) 3(-2.7,-0.635) 4(-2.7,-1.905) 5(2.7,-1.905) 6(2.7,-0.635) 7(2.7,0.635) 8(2.7,1.905)
SOT23-3
  rect 0.813x1.219 smd: 1(-0.95,-1.225) 2(0.95,-1.225) 3(0,1.225)
SOT23-5
  rect 1.118x0.61 smd: 1(-1.35,0.95) 2(-1.35,0) 3(-1.35,-0.95) 4(1.35,-0.95) 5(1.35,0.95)
SOT23-6
  rect 1.016x0.61 smd: 1(-1.4,0.95) 2(-1.4,0) 3(-1.4,-0.95) 4(1.4,-0.95) 5(1.4,0) 6(1.4,0.95)
SOT23-8
  rect 0.4x1.2 smd: 1(-0.975,-1.3)
  oval 0.4x1.2 smd: 2(-0.325,-1.3) 3(0.325,-1.3) 4(0.975,-1.3) 5(0.975,1.3) 6(0.325,1.3) 7(-0.325,1.3) 8(-0.975,1.3)
SOT23-236AB
  rect 0.61x0.914 smd: 1(-0.95,-1) 2(0.95,-1) 3(0,1)
SOT-23
  rect 0.686x0.991 smd: 1(-0.95,-1.295) 2(0,-1.295) 3(0.95,-1.295) 4(0.95,1.295) 5(-0.95,1.295)
SW2_3X6
  rect 1.778x1.016 smd: 1(-3.875,0) 2(3.875,0)
TF-15-15B
  round 1.016 hole 1.016 unplated: (-4.95,-3.5) (3.05,-3.5)
  rect 0.7x1.4 smd: 1(2.25,7.1) 2(1.15,7.1) 3(0.05,7.1) 4(-1.05,7.1) 5(-2.15,7.1) 6(-3.25,7.1) 7(-4.35,7.1) 8(-5.45,7.1) 9(-6.55,7.1)
  rect 1.6x1.4 smd: 10(-8,6.5) 11(6.85,6.5)
  rect 1.2x2.2 smd: 12(-7.75,-3.1) 13(7.75,-3.1)
TP4
  round 1 smd: 1(0,0)
TYPEC_16P
  round 0.635 hole 0.635 unplated: (-2.89,3.65) (2.89,3.65)
  rect 0.61x1.168 smd: A1B12(-3.2,4.75) A4B9(-2.4,4.75) B1A12(3.2,4.75) B4A9(2.4,4.75)
  rect 0.305x1.168 smd: A5(-1.25,4.75) A6(-0.25,4.75) A7(0.25,4.75) A8(-1.75,4.75) B5(1.75,4.75) B6(0.75,4.75) B7(-0.75,4.75) B8(1.25,4.75)
  oval 1.016x2.134 hole 0.61x1.727: G1(-4.32,4.15) G2(4.32,4.15)
  oval 1.016x1.829 hole 0.61x1.422: G3(-4.32,0) G4(4.32,0)
USB-H-2
  oval 1.067x1.321 hole 0.813: 1(2.1,0) 2(0.7,0) 3(-0.7,0) 4(-2.1,0)
  oval 2.184x2.616 hole 1.422x1.854: BO1(-3.08,-2) BO2(3.08,-2)
  oval 3.378x1.676 hole 2.616x0.914: BO3(0,-7.6)
XTAL3225M
  rect 1.2x1.2 smd: 1(-1.2,-0.95) 2(1.2,-0.95) 3(1.2,0.95) 4(-1.2,0.95)

## Nets
GND: BT1.2 C1.2 C2.2 C3.2 C4.2 C5.2 C6.2 C7.2 C8.2 C9.2 C10.2 C11.2 C12.1 C13.1 C14.2 C15.2 C16.2 C17.1 C18.1 C19.2 C20.2 C21.1 C22.1 C23.1 C24.1 C25.1 C26.1 C27.2 C28.2 C29.2 C30.1 C31.1 C32.1 C33.1 C34.1 C35.1 C36.1 C37.1 C38.1 C39.1 C40.1 C41.1 C42.1 C43.1 C46.2 C47.2 C50.2 C51.2 C52.2 C53.2 C54.2 C55.2 C56.2 C58.2 C59.2 C60.2 C61.2 C62.2 C63.2 C64.1 C65.1 C66.2 C67.2 C68.2 C70.1 C71.1 C72.1 C74.1 C75.2 C76.2 C77.1 C78.1 C79.1 C142.2 C340.2 C341.2 C342.1 C343.1 C344.2 C345.2 C430.2 C431.2 D3.3 D4.3 D5.3 D6.3 D10.A J1.12(LED_G-) J2.4(GND) J2.BO1(S1) J2.BO2(S2) J2.BO3(S3) J3.6(VSS#6) J3.10(VSS#10) J3.11(VSS#11) J3.12(VSS#12) J3.13(VSS#13) J4.2(D2S) J4.5(D1S) J4.8(D0S) J4.11(CLKS) J4.17(DCC/CECG) J4.BO1 J4.BO2 J4.BO3 J4.BO4 J5.A1B12(GND#A1B12) J5.B1A12(GND#B1A12) J5.G1(S1) J5.G2(S2) J5.G3(S3) J5.G4(S4) J7.3(C) J7.6(F) J8.C1(GND#C1) J8.C4(GND#C4) J8.C5(GND#C5) J8.C8(GND#C8) J8.C9(GND#C9) J8.C12(GND#C12) J8.C13(GND#C13) J8.C16(GND#C16) J8.C17(GND#C17) J8.C20(GND#C20) J8.C21(GND#C21) J8.C24(GND#C24) J8.C25(GND#C25) J8.C28(GND#C28) J8.C29(GND#C29) J8.C32(GND#C32) J8.C33(GND#C33) J8.C34(GA0) J8.C36(GND#C36) J8.C38(GND#C38) J8.C40(GND#C40) J8.D2(GND#D2) J8.D3(GND#D3) J8.D6(GND#D6) J8.D7(GND#D7) J8.D10(GND#D10) J8.D13(GND#D13) J8.D16(GND#D16) J8.D19(GND#D19) J8.D22(GND#D22) J8.D25(GND#D25) J8.D28(GND#D28) J8.D35(GA1) J8.D37(GND#D37) J8.D39(GND#D39) J8.G1(GND#G1) J8.G4(GND#G4) J8.G5(GND#G5) J8.G8(GND#G8) J8.G11(GND#G11) J8.G14(GND#G14) J8.G17(GND#G17) J8.G20(GND#G20) J8.G23(GND#G23) J8.G26(GND#G26) J8.G29(GND#G29) J8.G32(GND#G32) J8.G35(GND#G35) J8.G38(GND#G38) J8.G40(GND#G40) J8.H3(GND#H3) J8.H6(GND#H6) J8.H9(GND#H9) J8.H12(GND#H12) J8.H15(GND#H15) J8.H18(GND#H18) J8.H21(GND#H21) J8.H24(GND#H24) J8.H27(GND#H27) J8.H30(GND#H30) J8.H33(GND#H33) J8.H36(GND#H36) J8.H39(GND#H39) J9.2(GND2) J9.3(GND1) JM1.9(5) JM1.10(65) JM1.19(10) JM1.20(70) JM1.39(20) JM1.40(80) JM1.49(25) JM1.50(85) JM1.59(30) JM1.60(90) JM1.69(35) JM1.70(95) JM1.79(40) JM1.80(100) JM1.89(45) JM1.90(105) JM1.99(50) JM1.100(110) JM1.109(55) JM1.110(115) JM1.119(60) JM1.120 JM3.9(5) JM3.10(65) JM3.19(10) JM3.20(70) JM3.39(20) JM3.40(80) JM3.49(25) JM3.50(85) JM3.59(30) JM3.60(90) JM3.69(35) JM3.70(95) JM3.79(40) JM3.80(100) JP1.12 JP1.30 K1.1 K2.1 K3.1 M1.1 M2.1 M3.1 M4.1 M5.1 M6.1 M7.1 M8.1 Q3.2(S) Q4.2(S) Q5.2(S) Q9.2(E) R3.1 R7.2 R12.1 R35.2 R37.1 R38.1 R44.1 R53.2 R55.2 R58.2 R61.2 R74.1 R75.1 R85.2 R86.2 R87.2 R89.2 R91.1 R95.1 R98.1 SW1.3(B2) SW1.4(B1) U1.33(GND) U2.2(GND) U3.2(GND#2) U3.11(GND#11) U3.25(PGND) U4.3(GND#3) U4.8(GND#8) U5.3(GND#3) U5.8(GND#8) U6.3(GND#3) U6.8(GND#8) U7.1(GND#1) U7.5(GND#5) U7.10(AGND) U7.11(GND#11) U7.13(TEST) U7.15(GND#15) U7.25(GND#25) U7.35(GND#35) U7.47(GND#47) U7.51(GND#51) U8.2(GND) U9.2(VSS) U11.2(GND) U13.2(GND) U14.5(GND) U15.5(GND) U16.2(GND#2) U16.3(GND#3) U16.15(PWPD) U17.4(GND#4) U17.6(GND#6) U18.4(GND#4) U18.6(GND#6) U19.2(GND) U39.1(NC1) U39.2(A1) U39.3(A2) U39.4(GND) U39.7(WP) U44.2(GND) U45.4(VSS) U46.1(GND) U47.1(GND) U48.1(GND) Y1.2(GND#2) Y1.4(GND#4) Y2.2(GND) Y3.2(GND#2) Y3.4(GND#4)
VCC_1V8: C3.1 C4.1 C5.1 C6.1 C19.1 C69.1 C71.2 C72.2 C340.1 L2.2 R4.1 R10.2 R94.2 R162.2 R163.2 U1.8(REFSEL0) U1.11(REFSEL1) U1.14(REFSEL2) U1.28(VDD18#28) U1.30(VDD18#30) U1.32(VDDIO) U3.5(VCCA) U17.5(VOUT) U44.3(VCCA) U44.6(OE)
VCC_3V3: B1.1 B3.2 B4.1 C8.1 C9.1 C16.1 C17.2 C18.2 C21.2 C22.2 C46.1 C50.1 C52.1 C53.1 C73.1 C78.2 C79.2 C142.1 C341.1 D7.A D8.A D26.2 J3.4(VCC) J8.C39(3P3V0) J8.D32(3P3VAUX) J8.D36(3P3V1) J8.D38(3P3V2) J8.D40(3P3V3) JM1.29(15) JM1.30(75) JP1.29 L3.2 Q1.1(G) Q2.1(G) R2.2 R8.1 R11.2 R13.2 R14.2 R15.2 R16.2 R17.2 R19.2 R20.2 R21.2 R22.2 R23.2 R24.2 R25.2 R26.2 R27.1 R28.2 R29.2 R33.2 R56.1 R59.1 R62.2 R63.2 R64.1 R65.1 R66.1 R67.1 R68.1 R96.2 R97.2 R164.2 R165.2 R319.2 R320.2 R323.1 R324.1 R325.1 U1.21(VBAT) U3.17(VCCB1) U3.21(VCCB0) U11.3(VCC) U13.3(VCC) U14.8(VCC) U15.8(VCC) U18.5(VOUT) U39.8(VCC) U44.7(VCCB)
VCC_5V: C12.2 C13.2 C61.1 C62.1 C63.1 C70.2 C74.2 C77.2 D2.A JM3.111(56) JM3.112(116) JM3.113(57) JM3.114(117) JM3.115(58) JM3.116(118) JM3.117(59) JM3.118(119) JM3.119(60) JM3.120 JP1.11 L1.2 R82.2 R83.2 R92.2 R93.1 U2.5(IN) U17.2(VIN) U18.2(VIN) U19.1(VIN)
VCC_12V: C58.1 C59.1 C60.1 C64.2 C65.2 D9.A F2.2 J8.C35(12P0V0) J8.C37(12P0V1) R78.2 U16.4(PVIN#4) U16.5(PVIN#5) U16.6(VIN)
VCC_BAT: BT1.1 D26.1
VCC_HDMI1_5V: C23.2 C24.2 F1.2 J4.18(5V0) R31.2 R32.2
VCC_RTC: C342.2 C343.2 D26.3 U45.8(VDD)
VCC_USB5V: C10.1 C11.1 J2.1(VDD) R5.2 U2.1(OUT)
VCCIO13: B1.2 B2.2 JM3.29(15) JM3.30(75) JM3.89(45) JM3.90(105) U46.2(VREF1) U47.2(VREF1) U48.2(VREF1)
CAN0H: D3.1 J6.1(A) R52.2 U11.7(CANH)
CAN0L: D3.2 J6.2(B) R52.1 U11.6(CANL)
CAN1H: D4.1 J6.3(C) R54.2 U13.7(CANH)
CAN1L: D4.2 J6.4(D) R54.1 U13.6(CANL)
CON_SD_CLK: J3.5(CLK) R15.1 U3.19(CLKB0)
CON_SD_CMD: J3.3(CMD) R14.1 U3.20(CMDB0)
CON_SD_DATA0: J3.7(DAT0) R16.1 U3.18(DATA0B0)
CON_SD_DATA1: J3.8(DAT1) R17.1 U3.16(DATA1B0)
CON_SD_DATA2: J3.1(DAT2) R11.1 U3.23(DATA2B0)
CON_SD_DATA3: J3.2(DAT3) R13.1 U3.22(DATA3B0)
EECK: R46.2 U7.62(EECLK) U9.4(CLK)
EECS: R45.2 U7.63(EECS) U9.5(CS)
EEDI: R50.2 U7.61(EEDATA) U9.3(DI)
EEDO: R48.2 R50.1 U9.1(DO)
EEPROM_I2C_SCL: R321.2 U39.6(SCL)
EEPROM_I2C_SDA: R322.2 U39.5(SDA)
ETH_MDI0_N: J1.3(MDI0-) JM1.63(32)
ETH_MDI0_P: J1.2(MDI0+) JM1.61(31)
ETH_MDI1_N: J1.7(MDI1-) JM1.67(34)
ETH_MDI1_P: J1.4(MDI1+) JM1.65(33)
ETH_MDI2_N: J1.6(MDI2-) JM1.73(37)
ETH_MDI2_P: J1.5(MDI2+) JM1.71(36)
ETH_MDI3_N: J1.9(MDI3-) JM1.77(39)
ETH_MDI3_P: J1.8(MDI3+) JM1.75(38)
FMC_LPC_CLK0_M2C_N: J8.H5(CLK0_M2C_N) JM3.66(93)
FMC_LPC_CLK0_M2C_P: J8.H4(CLK0_M2C_P) JM3.68(94)
FMC_LPC_CLK1_M2C_N: J8.G3(CLK1_M2C_N) JM3.65(33)
FMC_LPC_CLK1_M2C_P: J8.G2(CLK1_M2C_P) JM3.67(34)
FMC_LPC_DP0_C2M_N: J8.C3(DP0_C2M_N)
FMC_LPC_DP0_C2M_P: J8.C2(DP0_C2M_P)
FMC_LPC_DP0_M2C_N: J8.C7(DP0_M2C_N)
FMC_LPC_DP0_M2C_P: J8.C6(DP0_M2C_P)
FMC_LPC_GBTCLK0_M2C_N: J8.D5(GBTCLK0_M2C_N)
FMC_LPC_GBTCLK0_M2C_P: J8.D4(GBTCLK0_M2C_P)
FMC_LPC_LA00_N_CC: J8.G7(LA00_N_CC) JM3.15(8)
FMC_LPC_LA00_P_CC: J8.G6(LA00_P_CC) JM3.17(9)
FMC_LPC_LA01_N_CC: J8.D9(LA01_N_CC) JM3.42(81)
FMC_LPC_LA01_P_CC: J8.D8(LA01_P_CC) JM3.44(82)
FMC_LPC_LA02_N: J8.H8(LA02_N) JM3.56(88)
FMC_LPC_LA02_P: J8.H7(LA02_P) JM3.58(89)
FMC_LPC_LA03_N: J8.G10(LA03_N) JM3.52(86)
FMC_LPC_LA03_P: J8.G9(LA03_P) JM3.54(87)
FMC_LPC_LA04_N: J8.H11(LA04_N) JM3.51(26)
FMC_LPC_LA04_P: J8.H10(LA04_P) JM3.53(27)
FMC_LPC_LA05_N: J8.D12(LA05_N) JM3.55(28)
FMC_LPC_LA05_P: J8.D11(LA05_P) JM3.57(29)
FMC_LPC_LA06_N: J8.C11(LA06_N) JM3.46(83)
FMC_LPC_LA06_P: J8.C10(LA06_P) JM3.48(84)
FMC_LPC_LA07_N: J8.H14(LA07_N) JM3.36(78)
FMC_LPC_LA07_P: J8.H13(LA07_P) JM3.38(79)
FMC_LPC_LA08_N: J8.G13(LA08_N) JM3.45(23)
FMC_LPC_LA08_P: J8.G12(LA08_P) JM3.47(24)
FMC_LPC_LA09_N: J8.D15(LA09_N) JM3.35(18)
FMC_LPC_LA09_P: J8.D14(LA09_P) JM3.37(19)
FMC_LPC_LA10_N: J8.C15(LA10_N) JM3.41(21)
FMC_LPC_LA10_P: J8.C14(LA10_P) JM3.43(22)
FMC_LPC_LA11_N: J8.H17(LA11_N) JM3.26(73)
FMC_LPC_LA11_P: J8.H16(LA11_P) JM3.28(74)
FMC_LPC_LA12_N: J8.G16(LA12_N) JM3.32(76)
FMC_LPC_LA12_P: J8.G15(LA12_P) JM3.34(77)
FMC_LPC_LA13_N: J8.D18(LA13_N) JM3.31(16)
FMC_LPC_LA13_P: J8.D17(LA13_P) JM3.33(17)
FMC_LPC_LA14_N: J8.C19(LA14_N) JM3.25(13)
FMC_LPC_LA14_P: J8.C18(LA14_P) JM3.27(14)
FMC_LPC_LA15_N: J8.H20(LA15_N) JM3.16(68)
FMC_LPC_LA15_P: J8.H19(LA15_P) JM3.18(69)
FMC_LPC_LA16_N: J8.G19(LA16_N) JM3.22(71)
FMC_LPC_LA16_P: J8.G18(LA16_P) JM3.24(72)
FMC_LPC_LA17_N_CC: J8.D21(LA17_N_CC) JM3.1
FMC_LPC_LA17_P_CC: J8.D20(LA17_P_CC) JM3.3(2)
FMC_LPC_LA18_N_CC: J8.C23(LA18_N_CC) JM3.2(61)
FMC_LPC_LA18_P_CC: J8.C22(LA18_P_CC) JM3.4(62)
FMC_LPC_LA19_N: J8.H23(LA19_N) JM3.6(63)
FMC_LPC_LA19_P: J8.H22(LA19_P) JM3.8(64)
FMC_LPC_LA20_N: J8.G22(LA20_N) JM3.12(66)
FMC_LPC_LA20_P: J8.G21(LA20_P) JM3.14(67)
FMC_LPC_LA21_N: J8.H26(LA21_N) JM3.62(91)
FMC_LPC_LA21_P: J8.H25(LA21_P) JM3.64(92)
FMC_LPC_LA22_N: J8.G25(LA22_N) JM3.82(101)
FMC_LPC_LA22_P: J8.G24(LA22_P) JM3.84(102)
FMC_LPC_LA23_N: J8.D24(LA23_N) JM3.86(103)
FMC_LPC_LA23_P: J8.D23(LA23_P) JM3.88(104)
FMC_LPC_LA24_N: J8.H29(LA24_N) JM3.81(41)
FMC_LPC_LA24_P: J8.H28(LA24_P) JM3.83(42)
FMC_LPC_LA25_N: J8.G28(LA25_N) JM3.85(43)
FMC_LPC_LA25_P: J8.G27(LA25_P) JM3.87(44)
FMC_LPC_LA26_N: J8.D27(LA26_N) JM3.72(96)
FMC_LPC_LA26_P: J8.D26(LA26_P) JM3.74(97)
FMC_LPC_LA27_N: J8.C27(LA27_N) JM3.76(98)
FMC_LPC_LA27_P: J8.C26(LA27_P) JM3.78(99)
FMC_LPC_LA28_N: J8.H32(LA28_N) JM3.71(36)
FMC_LPC_LA28_P: J8.H31(LA28_P) JM3.73(37)
FMC_LPC_LA29_N: J8.G31(LA29_N) JM3.75(38)
FMC_LPC_LA29_P: J8.G30(LA29_P) JM3.77(39)
FMC_LPC_LA30_N: J8.H35(LA30_N) JM3.61(31)
FMC_LPC_LA30_P: J8.H34(LA30_P) JM3.63(32)
FMC_LPC_LA31_N: J8.G34(LA31_N)
FMC_LPC_LA31_P: J8.G33(LA31_P)
FMC_LPC_LA32_N: J8.H38(LA32_N)
FMC_LPC_LA32_P: J8.H37(LA32_P)
FMC_LPC_LA33_N: J8.G37(LA33_N)
FMC_LPC_LA33_P: J8.G36(LA33_P)
FMC_LPC_PG_C2M: J8.D1(PG_C2M) R63.1
FMC_LPC_PRSNT_M2C_L: J8.H2(PRSNT_M2C_L) R62.1
FMC_LPC_TCK: J8.D29(TCK)
FMC_LPC_TDI: J8.D30(TDI)
FMC_LPC_TDO: J8.D31(TDO)
FMC_LPC_TMS: J8.D33(TMS)
FPGA_GCLK1: JM1.36(78) R18.2
FPGA_TCK: JM3.103(52) R39.2
FPGA_TDI: JM3.99(50) R40.2
FPGA_TDO: JM3.101(51) R41.2
FPGA_TMS: JM3.105(53) R42.2
GPIO1_0N: JM1.54(87) JP1.2
GPIO1_0P: JM1.52(86) JP1.1
GPIO1_1N: JM1.58(89) JP1.4
GPIO1_1P: JM1.56(88) JP1.3
GPIO1_2N: JM1.44(82) JP1.6
GPIO1_2P: JM1.42(81) JP1.5
GPIO1_3N: JM1.48(84) JP1.8
GPIO1_3P: JM1.46(83) JP1.7
GPIO1_4N: JM1.53(27) JP1.10
GPIO1_4P: JM1.51(26) JP1.9
GPIO1_5N: JM1.57(29) JP1.14
GPIO1_5P: JM1.55(28) JP1.13
GPIO1_6N: JM1.43(22) JP1.16
GPIO1_6P: JM1.41(21) JP1.15
GPIO1_7N: JM1.47(24) JP1.18
GPIO1_7P: JM1.45(23) JP1.17
GPIO1_8N: JM1.33(17) JP1.20 Q5.1(G) R75.2
GPIO1_8P: JM1.31(16) JP1.19 R71.1
GPIO1_9N: JM1.37(19) JP1.22
GPIO1_9P: JM1.35(18) JP1.21
GPIO1_10N: JM1.23(12) JP1.24
GPIO1_10P: JM1.21(11) JP1.23
GPIO1_11N: JM1.27(14) JP1.26
GPIO1_11P: JM1.25(13) JP1.25
GPIO1_12N: JM1.34(77) JP1.28
GPIO1_12P: JM1.32(76) JP1.27
GPIO1_13N: JM1.13(7) JP1.32
GPIO1_13P: JM1.11(6) JP1.31
GPIO1_14N: JM1.7(4) JP1.34
GPIO1_14P: JM1.5(3) JP1.33
GPIO1_15N: JM1.3(2) JP1.36
GPIO1_15P: JM1.1 JP1.35
GPIO1_16N: JM1.4(62) JP1.38
GPIO1_16P: JM1.2(61) JP1.37
GPIO1_17N: JM1.8(64) JP1.40
GPIO1_17P: JM1.6(63) JP1.39
HDMI1_CLK_N: J4.12(CLK-) JM1.28(74) R26.1 U5.5(IN4) U5.6(OUT4)
HDMI1_CLK_P: J4.10(CLK+) JM1.26(73) R25.1 U5.4(IN3) U5.7(OUT3)
HDMI1_D0_N: J4.9(D0-) JM1.24(72) R24.1 U5.2(IN2) U5.9(OUT2)
HDMI1_D0_P: J4.7(D0+) JM1.22(71) R23.1 U5.1(IN1) U5.10(OUT1)
HDMI1_D1_N: J4.6(D1-) JM1.18(69) R22.1 U4.5(IN4) U4.6(OUT4)
HDMI1_D1_P: J4.4(D1+) JM1.16(68) R21.1 U4.4(IN3) U4.7(OUT3)
HDMI1_D2_N: J4.3(D2-) JM1.14(67) R20.1 U4.2(IN2) U4.9(OUT2)
HDMI1_D2_P: J4.1(D2+) JM1.12(66) R19.1 U4.1(IN1) U4.10(OUT1)
HDMI1_HPD_CON: J4.19(HPD) R30.2 R35.1
HDMI1_HPDN: JM1.38(79) Q3.3(D) R33.1
HDMI1_I2C_SCL_LS: J4.15(SCL) Q1.3(D) R31.1
HDMI1_I2C_SDA_LS: J4.16(SDA) Q2.3(D) R32.1
I2C_SCL: JM1.15(8) R34.1
I2C_SDA: JM1.17(9) R36.1
MIO47: JM1.92(106)
MIO48: JM1.88(104)
MIO49: JM1.86(103)
MODE0: JM3.106(113) SW1.1(A1)
MODE1: JM3.108(114) SW1.2(A2)
PG_1V8: R92.1 R99.1 U17.1(PG)
PG_3V3: R88.1 R96.1 U18.1(PG)
PG_5V: R82.1 U16.14(PWRGD)
PG_SYS: JM3.104(112) R100.1 U19.3(EN)
PHY_LED1: JM1.64(92) R1.2
PHY_LED2: J1.13(LED_Y-) JM1.62(91)
PL_485_DE0: U14.2(RE) U14.3(DE) U48.6(SCL2)
PL_485_DE0_LS: JM3.11(6) U48.3(SCL1)
PL_485_DE1: U15.2(RE) U15.3(DE) U48.5(SDA2)
PL_485_DE1_LS: JM3.5(3) U48.4(SDA1)
PL_485_RXD0: U14.1(RO) U46.6(SCL2)
PL_485_RXD0_LS: JM3.7(4) U46.3(SCL1)
PL_485_RXD1: U15.1(RO) U47.6(SCL2)
PL_485_RXD1_LS: JM3.21(11) U47.3(SCL1)
PL_485_TXD0: U14.4(DI) U46.5(SDA2)
PL_485_TXD0_LS: JM3.13(7) U46.4(SDA1)
PL_485_TXD1: U15.4(DI) U47.5(SDA2)
PL_485_TXD1_LS: JM3.23(12) U47.4(SDA1)
PS_CAN0_RX: JM1.115(58) U11.4(R)
PS_CAN0_TX: JM1.116(118) U11.1(D)
PS_CAN1_RX: JM1.118(119) U13.4(R)
PS_CAN1_TX: JM1.111(56) U13.1(D)
PS_I2C_SCL: JM1.84(102) R162.1 U44.5(A1)
PS_I2C_SCL_SE: J8.C30(SCL) R65.2 R164.1 R319.1 R321.1 U44.8(B1) U45.6(SCL)
PS_I2C_SDA: JM1.82(101) R163.1 U44.4(A2)
PS_I2C_SDA_SE: J8.C31(SDA) R64.2 R165.1 R320.1 R322.1 U44.1(B2) U45.5(SDA)
PS_KEY: JM1.112(116) R70.1
PS_LED: JM1.114(117) Q4.1(G) R74.2
PS_POR_B: JM3.107(54)
PS_UART_RX: JM1.117(59) R47.1
PS_UART_TX: JM1.113(57) R49.1
RESET_N: JM3.102(111) R69.1
SD_CLK: JM1.94(107) U3.9(CLKA)
SD_CMD: JM1.102(111) U3.4(CMDA)
SD_DATA0: JM1.98(109) U3.6(DATA0A)
SD_DATA1: JM1.96(108) U3.7(DATA1A)
SD_DATA2: JM1.106(113) U3.1(DATA2A)
SD_DATA3: JM1.104(112) U3.3(DATA3A)
USB_CLK: JM1.103(52) R6.2
USB_CLK_IN: C32.2 R51.1 U7.2(OSCI) Y3.1(NC)
USB_CLK_OUT: C33.2 R51.2 U7.3(OSCO) Y3.3(OUT)
USB_DATA0: JM1.97(49) U1.3(DATA0)
USB_DATA1: JM1.95(48) U1.4(DATA1)
USB_DATA2: JM1.93(47) U1.5(DATA2)
USB_DATA3: JM1.91(46) U1.6(DATA3)
USB_DATA4: JM1.87(44) U1.7(DATA4)
USB_DATA5: JM1.85(43) U1.9(DATA5)
USB_DATA6: JM1.83(42) U1.10(DATA6)
USB_DATA7: JM1.81(41) U1.13(DATA7)
USB_DIR: JM1.105(53) U1.31(DIR)
USB_HOST_CPEN: U1.17(CPEN) U2.4(\\E\N)
USB_HOST_ID: U1.23(ID)
USB_HOST_N: J2.2(DM) U1.19(DM)
USB_HOST_P: J2.3(DP) U1.18(DP)
USB_NRST: JM1.108(114) R4.2 U1.27(RESETB)
USB_NXT: JM1.101(51) U1.2(NXT)
USB_STP: JM1.107(54) U1.29(STP)
USBJTAG_DM: J5.A7(DN1) J5.B7(DN2) U6.2(IN2) U6.9(OUT2) U7.7(DM)
USBJTAG_DP: J5.A6(DP1) J5.B6(DP2) U6.1(IN1) U6.10(OUT1) U7.8(DP)
VADJ: B2.1 C75.1 C76.1 J8.G39(VADJ2) J8.H40(VADJ3) U19.5(VOUT)
VREF_CAN0: C47.1 U11.5(VREF)
VREF_CAN1: C51.1 U13.5(VREF)
VUSBJTAG_1V8: C28.1 C34.2 C35.2 C36.2 U7.12(VCORE#12) U7.37(VCORE#37) U7.49(VREGOUT) U7.64(VCORE#64)
VUSBJTAG_3V3: B4.2 C27.1 C31.2 C37.2 C38.2 C39.2 C40.2 C41.2 C42.2 C43.2 R43.1 R45.1 R46.1 R48.1 U7.4(VPHY) U7.9(VPLL) U7.20(VCCIO#20) U7.31(VCCIO#31) U7.42(VCCIO#42) U7.50(VREGIN) U7.56(VCCIO#56) U8.5(VOUT) U9.6(VCC)
VUSBJTAG_5V: C25.2 C26.2 C30.2 J5.A4B9(VBUS#A4B9) J5.B4A9(VBUS#B4A9) U8.1(VIN) U8.3(EN)
N18237261: J1.11(LED_G+) R1.1
N18237263: J1.14(LED_Y+) R2.1
N18237267: C2.1 J1.10(PGND) J1.15(SHIELD1) J1.16(SHIELD2) R3.2
N18237441: C1.1 J1.1(CT)
N18239746: R10.1 R12.2 U3.24(SEL)
N18239947: J3.9(CD) TP1.1
N18240505: B3.1 C20.1 Y2.1(OE) Y2.4(VDD)
N18240578: R18.1 Y2.3(OUT)
N18241178: R93.2 U17.8(EN)
N18241197: C69.2 R94.1 R95.2 U17.7(FB)
N18241290: L2.1 U17.3(SW)
N18241708: R99.2 R100.2 U18.8(EN)
N18241774: C73.2 R97.1 R98.2 U18.7(FB)
N18241890: L3.1 U18.3(SW)
N18245818: D1.A R27.2
N18245822: Q3.1(G) R30.1
N18245895: D1.K J4.13(CEC)
N18245901: D2.K F1.1
N18246051: Q1.2(S) R28.1 R34.2
N18246067: Q2.2(S) R29.1 R36.2
N18262262: R41.1 U7.18(ADBUS2)
N18262264: R40.1 U7.17(ADBUS1)
N18262266: R39.1 U7.16(ADBUS0)
N18262290: R42.1 U7.19(ADBUS3)
N18262588: R44.2 U7.6(REF)
N18262590: R47.2 U7.38(BDBUS0)
N18262592: R49.2 U7.39(BDBUS1)
N18262636: C29.1 R43.2 U7.14(R\E\S\E\T\)
N18262722: J5.B5(CC2) R37.2
N18262752: J5.A5(CC1) R38.2
N18264024: C15.1 R9.2 U1.25(XO) Y1.3(OUT)
N18264026: C14.1 R9.1 U1.26(REFCLK) Y1.1(NC)
N18264140: R5.1 U1.22(VBUS)
N18264206: R7.1 U1.24(RBIAS)
N18264267: C7.1 U1.20(VDD33)
N18264300: R6.1 U1.1(CLKOUT)
N18264900: R8.2 U2.3(\\O\C)
N18296189: Q7.G Q8.3(COLLECTOR) R79.2 R87.1
N18296225: D9.K R84.1
N18296269: Q9.3(C) R84.2
N18296311: D10.K R77.2 R81.1
N18296364: Q6.G R76.2 R85.1
N18296370: Q6.S Q7.S Q8.2(EMITTER) R76.1 R77.1 R79.1
N18296400: Q8.1(BASE) R81.2
N18296454: F2.1 Q7.D
N18296456: Q9.1(B) R88.2
N18296469: J9.1(VCC) Q6.D
N18298241: R78.1 R86.1 U16.10(EN)
N18298368: C57.2 L1.1 U16.11(PH1) U16.12(PH2)
N18298406: R83.1 R91.2 U16.7(VSNS_FB)
N18298446: C57.1 U16.13(BOOT)
N18298502: C68.1 R90.2
N18298518: C67.1 R90.1 U16.8(COMP)
N18298566: C66.1 U16.9(SS/TR)
N18298574: R89.1 U16.1(RT/CLK)
N18301135: C56.1 K3.2 R68.2 R71.2
N18301258: C55.1 K2.2 R67.2 R70.2
N18301557: Q5.3(D) R72.1
N18301563: D8.K R72.2
N18301575: D7.K R73.2
N18301577: Q4.3(D) R73.1
N18301945: C54.1 K1.2 R66.2 R69.2
N18398375: C344.1 U45.1(OSCI) Y5.2
N18398392: C345.1 U45.2(OSCO) Y5.1
N18401992: C430.1 J8.ST1(GND_ST1)
N18402534: C431.1 J8.ST2(GND_ST2)
N18429803: R323.2 U46.7(VREF2) U46.8(EN)
N18430481: R324.2 U48.7(VREF2) U48.8(EN)
N18431575: R325.2 U47.7(VREF2) U47.8(EN)
N20003496: D5.1 J7.1(A) R57.2 R58.1 U14.7(B)
N20003504: D5.2 J7.2(B) R56.2 R57.1 U14.6(A)
N20003831: D6.1 J7.4(D) R60.1 R61.1 U15.7(B)
N20003842: D6.2 J7.5(E) R59.2 R60.2 U15.6(A)
N20066356: R53.1 U11.8(RS)
N20066403: R55.1 U13.8(RS)

Pads without a net: BT1 3 4; J4 14; J5 A8 B8; J8 D34 H1; JM1 66 68 72 74 76 78; JM3 91 92 93 94 95 96 97 98 100 109 110; U1 12 15 16; U3 8 10 12 13 14 15; U6 4 5 6 7; U7 21 22 23 24 26 27 28 29 30 32 33 34 36 40 41 43 44 45 46 48 52 53 54 55 57 58 59 60; U8 4; U19 4; U45 3 7; Y5 3

## Text on the board
Ref Des/Silkscreen Bottom: A | B | L | H | GND | 24-DEV0726B01-R20
Ref Des/Silkscreen Top: PL | LED | KEY | PS | RST | 40 | 1 | JTAG | QSPI | MODE | SD | ON | OFF | 2
User.7: 10 | 1 | C63 | B5 | B4 | B1 | C49 | C75 | R17 | C88 | D7 | C30 | C20 | C36 | C67 | C66 | C113 | C111 | C118 | JM1 | JM3 | C45 | C43 | C44 | R67 | C19 | R15 | C52 | R46 | C76 | C83 | C96 | U8 | C61 | C64 | C65 | C7 | C28 | 23-XME0726C42-R10
